# Altium PCB CM4mini.PcbDoc
Units mm, origin at the board's own origin, x right, y up, seen from the top; angles counter-clockwise.
Board outline 133.55 x 93.54 mm, 2 copper layers (Top Layer, Bottom Layer); 7 components, 0 nets, 332 pads, 0 vias.
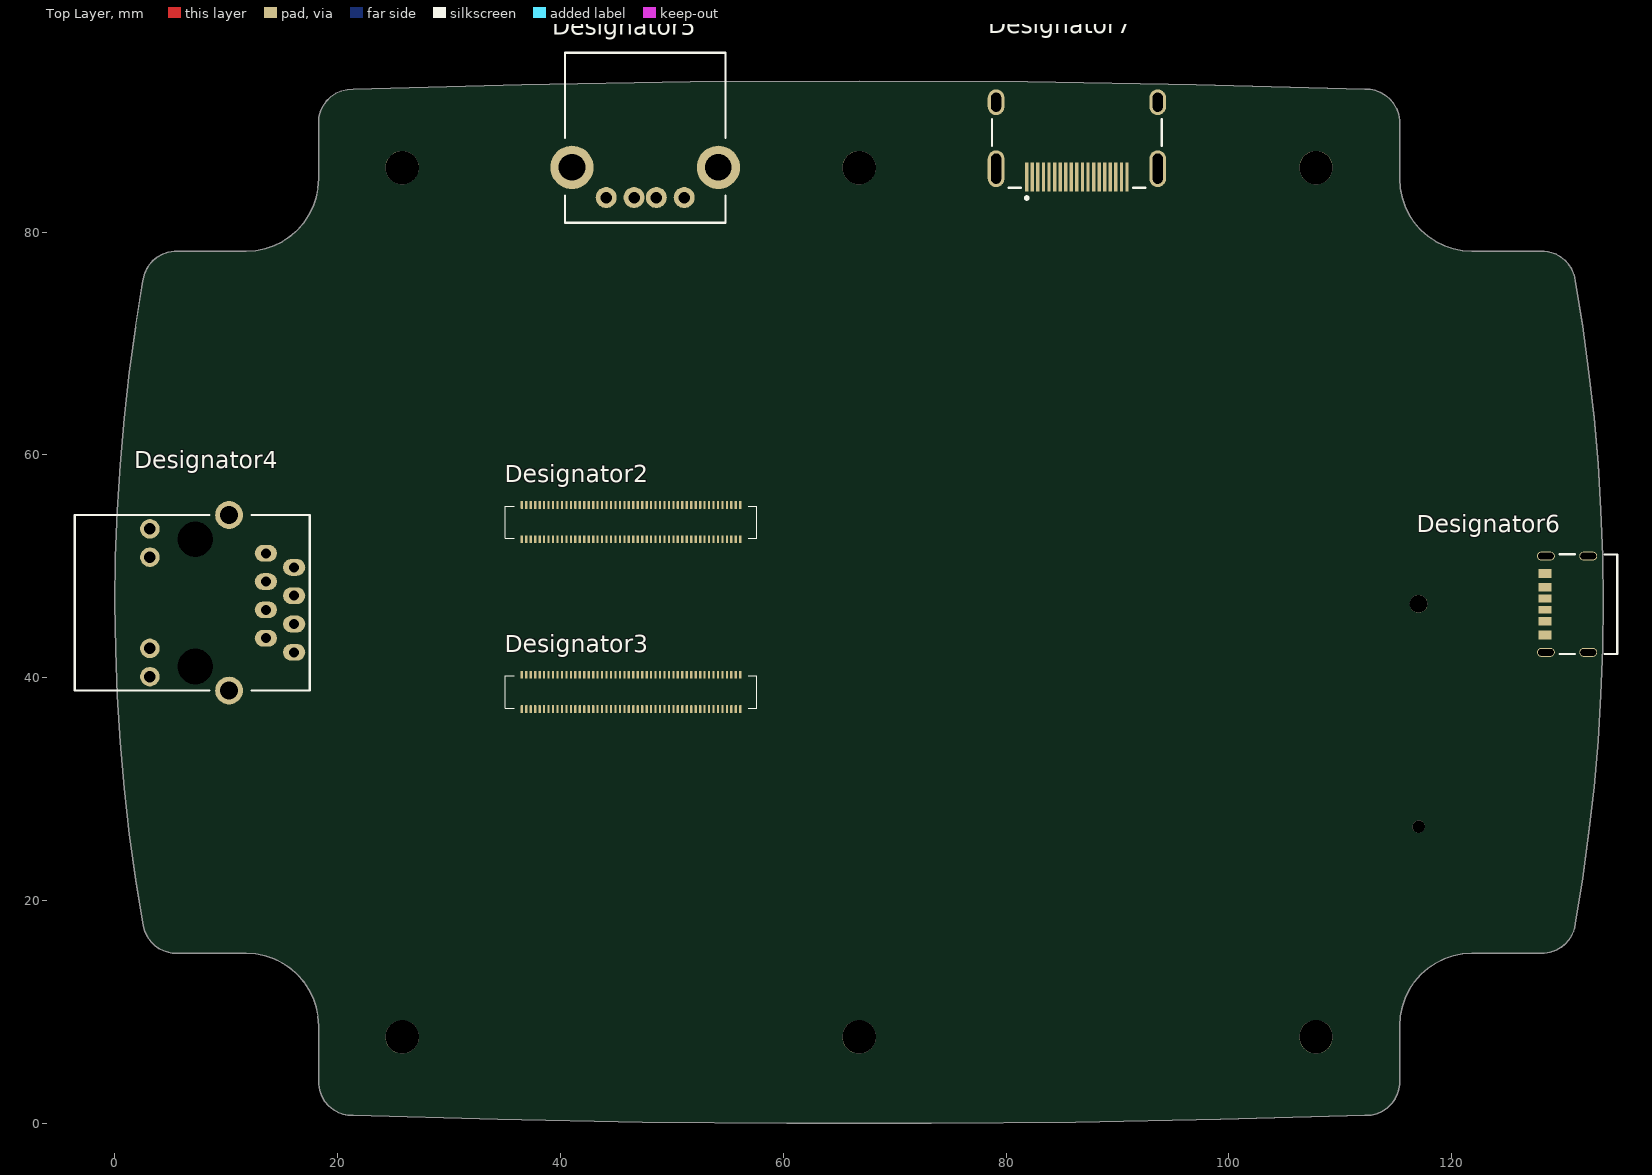
[diagram p0: Top Layer view]
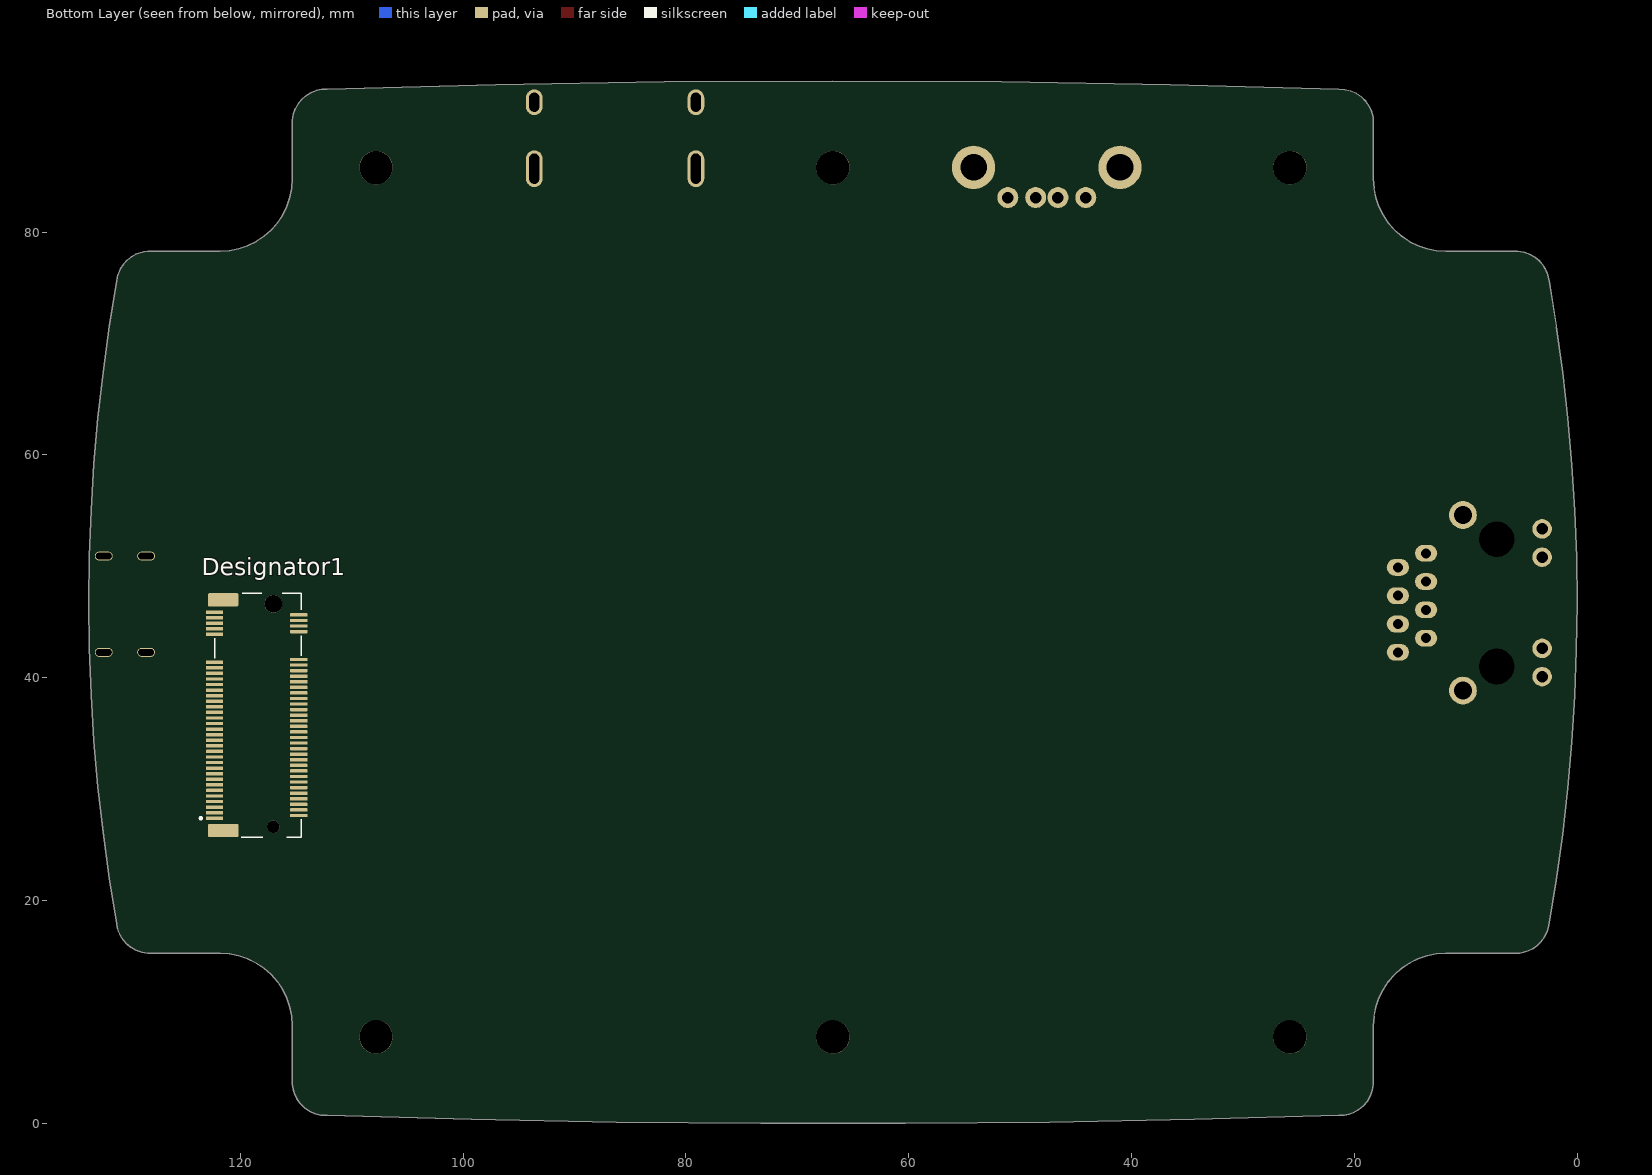
[diagram p1: Bottom Layer view, seen from below]

## Layer stack, top to bottom
Top Solder: solder mask 0.0102, Solder Resist, Dk 3.5
Top Layer: signal copper 0.0356
Dielectric 1: dielectric 0.32, FR-4, Dk 4.8
Bottom Layer: signal copper 0.0356
Bottom Solder: solder mask 0.0102, Solder Resist, Dk 3.5

## Board outline
18.318,84.781 18.263,83.933 18.097,83.099 17.824,82.294 17.448,81.531 16.975,80.824 16.415,80.185 15.775,79.625 15.068,79.152 14.306,78.776 13.501,78.503 12.667,78.337 11.818,78.281 5.35,78.281 4.809,78.197 4.29,78.016 3.814,77.743 3.432,77.425 3.137,77.089 2.896,76.711 2.713,76.302 2.614,75.967 2.555,75.624 1.888,71.524 1.322,67.409 0.86,63.28 0.501,59.142 0.244,54.996 0.091,50.844 0.042,46.69 0.096,42.537 0.253,38.386 0.514,34.24 0.878,30.102 1.345,25.974 1.915,21.859 2.587,17.759 2.731,17.231 2.969,16.736 3.294,16.294 3.653,15.95 4.02,15.695 4.422,15.498 4.85,15.362 5.194,15.302 5.542,15.281 11.818,15.281 12.667,15.226 13.501,15.06 14.306,14.787 15.068,14.411 15.775,13.938 16.415,13.378 16.975,12.738 17.448,12.031 17.824,11.269 18.097,10.464 18.263,9.63 18.318,8.781 18.318,3.532 18.407,2.992 18.591,2.475 18.867,2.002 19.227,1.583 19.656,1.238 20.092,0.999 20.515,0.849 20.957,0.762 21.19,0.743 21.423,0.743 34.39,0.381 47.36,0.14 60.332,0.02 73.305,0.02 86.276,0.14 99.247,0.381 112.214,0.743 112.76,0.773 113.294,0.901 113.794,1.125 114.248,1.438 114.637,1.828 114.921,2.236 115.116,2.641 115.249,3.071 115.293,3.3 115.318,3.532 115.318,8.781 115.374,9.63 115.54,10.464 115.813,11.269 116.189,12.031 116.662,12.738 117.222,13.378 117.861,13.938 118.568,14.411 119.331,14.787 120.136,15.06 120.97,15.226 121.818,15.281 128.287,15.281 128.828,15.366 129.347,15.547 129.823,15.819 130.205,16.137 130.5,16.474 130.741,16.851 130.924,17.261 131.023,17.596 131.082,17.939 131.747,22.026 132.311,26.128 132.773,30.244 133.132,34.369 133.389,38.502 133.543,42.641 133.595,46.781 133.543,50.922 133.389,55.06 133.132,59.194 132.773,63.319 132.311,67.434 131.747,71.537 131.082,75.624 130.971,76.161 130.763,76.669 130.467,77.131 130.13,77.496 129.779,77.774 129.39,77.996 128.972,78.158 128.632,78.239 128.287,78.281 121.818,78.281 120.97,78.337 120.136,78.503 119.331,78.776 118.568,79.152 117.861,79.625 117.222,80.185 116.662,80.824 116.189,81.531 115.813,82.294 115.54,83.099 115.374,83.933 115.318,84.781 115.318,90.031 115.23,90.571 115.045,91.088 114.77,91.561 114.41,91.98 113.98,92.324 113.544,92.563 113.122,92.714 112.68,92.801 112.447,92.819 112.214,92.82 97.085,93.23 81.953,93.476 66.818,93.558 51.684,93.476 36.552,93.23 21.423,92.82 20.877,92.79 20.343,92.661 19.843,92.438 19.389,92.125 19,91.734 18.716,91.326 18.521,90.922 18.388,90.492 18.344,90.262 18.318,90.031

## Design rules (kind name [scope] priority, off if disabled: settings)
Clearance [All] p1: gap=0.254 ignorepadtopadclearanceinfootprint=FALSE except(0: Arc-Hole Track-Hole SMDPad-Hole THPad-Hole Via-Hole Fill-Hole Poly-Hole Region-Hole Text-Hole)
PolygonConnect [All] p1: connectstyle=Relief reliefconductorwidth=0.254 reliefentries=4 polygonreliefangle="90 Angle" airgapwidth=0.254
RoutingVias [All] p1: holewidth=0.711 width=1.27 viastyle="Through Hole" minholewidth=0.711 minwidth=1.27 maxholewidth=0.711 maxwidth=1.27
SolderMaskExpansion [All] p1: expansion=0.102 istentingtop=FALSE
Width [All] p1: maxlimit=0.254 minlimit=0.254 preferedwidth=0.254
30 further rules are at their usual default settings.

## Components (designator, comment, footprint, x,y, rotation, side; value= is the part's Value field where it differs from the comment)
Designator1 "Comment" 1-2199119-3 118.526,36.651 r90 bottom
Designator2 "Comment" DF40C100DS04V51 46.355,53.975 r0 top
Designator3 "Comment" DF40C100DS04V51 46.355,38.735 r0 top
Designator4 "Comment" "ABRACON ARJC02-111008B" 6.985,46.736 r270 top
Designator5 "Comment" 67643-2911 47.625,84.455 r180 top
Designator6 "Comment" GCT_USB4125-GF-A 131.445,46.609 r90 top
Designator7 "Comment" 47151-1001 86.36,90.17 r180 top

## Footprints (in the part's own frame and the unit in brackets; to place one, negate y for a bottom-side part, rotate by r counter-clockwise, add the part's x,y. Pads: shape width x height; smd on the part's side, far side on the other; paste and mask are expansions set on the pad)
1-2199119-3 [mm]
  rrect25% 0.3x1.55 smd: 1(-9.25,3.775) 2(-9,-3.775) 3(-8.75,3.775) 4(-8.5,-3.775) 5(-8.25,3.775) 6(-8,-3.775) 7(-7.75,3.775) 8(-7.5,-3.775) 9(-7.25,3.775) 10(-7,-3.775) 11(-6.75,3.775) 12(-6.5,-3.775) 13(-6.25,3.775) 14(-6,-3.775) 15(-5.75,3.775) 16(-5.5,-3.775) 17(-5.25,3.775) 18(-5,-3.775) 19(-4.75,3.775) 20(-4.5,-3.775) 21(-4.25,3.775) 22(-4,-3.775) 23(-3.75,3.775) 24(-3.5,-3.775) 25(-3.25,3.775) 26(-3,-3.775) 27(-2.75,3.775) 28(-2.5,-3.775) 29(-2.25,3.775) 30(-2,-3.775) 31(-1.75,3.775) 32(-1.5,-3.775) 33(-1.25,3.775) 34(-1,-3.775) 35(-0.75,3.775) 36(-0.5,-3.775) 37(-0.25,3.775) 38(0,-3.775) 39(0.25,3.775) 40(0.5,-3.775) 41(0.75,3.775) 42(1,-3.775) 43(1.25,3.775) 44(1.5,-3.775) 45(1.75,3.775) 46(2,-3.775) 47(2.25,3.775) 48(2.5,-3.775) 49(2.75,3.775) 50(3,-3.775) 51(3.25,3.775) 52(3.5,-3.775) 53(3.75,3.775) 54(4,-3.775) 55(4.25,3.775) 56(4.5,-3.775) 57(4.75,3.775) 58(5,-3.775) 67(7.25,3.775) 68(7.5,-3.775) 69(7.75,3.775) 70(8,-3.775) 71(8.25,3.775) 72(8.5,-3.775) 73(8.75,3.775) 74(9,-3.775) 75(9.25,3.775)
  round 1.1 hole 1.1 unplated: MH1(-10,-1.5)
  round 1.6 hole 1.6 unplated: MH2(10,-1.5)
  rrect25% 1.2x2.75 smd: S1(-10.35,3) S2(10.35,3)
  silkscreen extent -10.95,-4 10.95,5.1, body extent -10.95,-4.32 10.95,4.38, height 3.11
47151-1001 [mm]
  rect 0.3x2.6 smd paste+0 mask+0: 1(4.5,5.235) 2(4,5.235) 3(3.5,5.235) 4(3,5.235) 5(2.5,5.235) 6(2,5.235) 7(1.5,5.235) 8(1,5.235) 9(0.5,5.235) 10(0,5.235) 11(-0.5,5.235) 12(-1,5.235) 13(-1.5,5.235) 14(-2,5.235) 15(-2.5,5.235) 16(-3,5.235) 17(-3.5,5.235) 18(-4,5.235) 19(-4.5,5.235)
  oval 1.5x3.3 hole 2.7 slot 0.9 at 0 deg paste-1000 mask+0: 20(-7.25,4.475) 21(7.25,4.475)
  oval 1.5x2.3 hole 1.7 slot 0.9 at 0 deg paste-1000 mask+0: 22(-7.25,-1.485) 23(7.25,-1.485)
  silkscreen extent -7.63,0.04 7.63,7.23, body extent -7.5,-6 7.5,6.15, height 6.23
67643-2911 [mm]
  round 1.88 hole 1.03: 1(-3.5,1.355) 2(-1,1.355) 3(1,1.355) 4(3.5,1.355)
  round 3.88 hole 2.38: 5(6.57,-1.355) 6(-6.57,-1.355)
  silkscreen extent -7.2,-11.63 7.2,3.63, body extent -7.99,-11.64 8,3.62, height 7.73
"ABRACON ARJC02-111008B" [mm]
  oval 1.5x2 hole 0.9: 1(-4.445,6.6) 2(-3.175,9.14) 3(-1.905,6.6) 4(-0.635,9.14) 5(0.635,6.6) 6(1.905,9.14) 7(3.175,6.6) 8(4.445,9.14)
  round 1.75 hole 1.02: 9(-6.63,-3.81) 10(-4.09,-3.81) 11(4.09,-3.81) 12(6.63,-3.81)
  round 0 hole 3.2 unplated: M(-5.715,0.25) M(5.715,0.25)
  round 2.5 hole 1.6: S(-7.875,3.3) S(7.875,3.3)
  silkscreen extent -7.87,-10.55 7.87,10.54, body extent -10.34,-10.55 10.34,10.55, height 16.07
DF40C100DS04V51 [mm]
  rrect25% 0.2x0.7 smd: 1(-9.8,-1.54) 2(-9.8,1.54) 3(-9.4,-1.54) 4(-9.4,1.54) 5(-9,-1.54) 6(-9,1.54) 7(-8.6,-1.54) 8(-8.6,1.54) 9(-8.2,-1.54) 10(-8.2,1.54) 11(-7.8,-1.54) 12(-7.8,1.54) 13(-7.4,-1.54) 14(-7.4,1.54) 15(-7,-1.54) 16(-7,1.54) 17(-6.6,-1.54) 18(-6.6,1.54) 19(-6.2,-1.54) 20(-6.2,1.54) 21(-5.8,-1.54) 22(-5.8,1.54) 23(-5.4,-1.54) 24(-5.4,1.54) 25(-5,-1.54) 26(-5,1.54) 27(-4.6,-1.54) 28(-4.6,1.54) 29(-4.2,-1.54) 30(-4.2,1.54) 31(-3.8,-1.54) 32(-3.8,1.54) 33(-3.4,-1.54) 34(-3.4,1.54) 35(-3,-1.54) 36(-3,1.54) 37(-2.6,-1.54) 38(-2.6,1.54) 39(-2.2,-1.54) 40(-2.2,1.54) 41(-1.8,-1.54) 42(-1.8,1.54) 43(-1.4,-1.54) 44(-1.4,1.54) 45(-1,-1.54) 46(-1,1.54) 47(-0.6,-1.54) 48(-0.6,1.54) 49(-0.2,-1.54) 50(-0.2,1.54) 51(0.2,-1.54) 52(0.2,1.54) 53(0.6,-1.54) 54(0.6,1.54) 55(1,-1.54) 56(1,1.54) 57(1.4,-1.54) 58(1.4,1.54) 59(1.8,-1.54) 60(1.8,1.54) 61(2.2,-1.54) 62(2.2,1.54) 63(2.6,-1.54) 64(2.6,1.54) 65(3,-1.54) 66(3,1.54) 67(3.4,-1.54) 68(3.4,1.54) 69(3.8,-1.54) 70(3.8,1.54) 71(4.2,-1.54) 72(4.2,1.54) 73(4.6,-1.54) 74(4.6,1.54) 75(5,-1.54) 76(5,1.54) 77(5.4,-1.54) 78(5.4,1.54) 79(5.8,-1.54) 80(5.8,1.54) 81(6.2,-1.54) 82(6.2,1.54) 83(6.6,-1.54) 84(6.6,1.54) 85(7,-1.54) 86(7,1.54) 87(7.4,-1.54) 88(7.4,1.54) 89(7.8,-1.54) 90(7.8,1.54) 91(8.2,-1.54) 92(8.2,1.54) 93(8.6,-1.54) 94(8.6,1.54) 95(9,-1.54) 96(9,1.54) 97(9.4,-1.54) 98(9.4,1.54) 99(9.8,-1.54) 100(9.8,1.54)
  silkscreen extent -11.3,-1.44 11.3,1.44, body extent -11.3,-1.69 11.3,1.69, height 1.4
GCT_USB4125-GF-A [mm]
  rect 0.7x1.2 smd: A5(-0.5,3.08) B5(0.5,3.08)
  rect 0.76x1.2 smd: A9(1.52,3.08) B9(-1.52,3.08)
  rect 0.8x1.2 smd: A12(2.75,3.08) B12(-2.75,3.08)
  oval 0.8x1.6 hole 0.6 slot 1.4 at 90 deg mask+0: S1(-4.32,3) S2(4.32,3) S3(-4.32,-0.8) S4(4.32,-0.8)
  silkscreen extent -4.47,-3.4 4.47,1.75, body extent -4.47,-3.4 4.47,3.5, height 3.26

## Free pads (board coordinates)
  round 3 hole 3: 1(25.818,7.781) 1(25.818,85.781) 1(66.818,7.781) 1(66.818,85.781) 1(107.818,7.781) 1(107.818,85.781)

## Nets (pads, with @x,y where several pads share a name; then routed paths per layer and width w, separated by ;. In a path a pad name is that pad's centre, name@x,y a point inside that pad or via, vN(x,y) a via of type N, cw(c..) or ccw(c..) an arc to the next point about the centre after c; other vN are vias at no path point)
pads on no net: Designator1.1 Designator1.2 Designator1.3 Designator1.4 Designator1.5 Designator1.6 Designator1.7 Designator1.8 Designator1.9 Designator1.10 Designator1.11 Designator1.12 Designator1.13 Designator1.14 Designator1.15 Designator1.16 Designator1.17 Designator1.18 Designator1.19 Designator1.20 Designator1.21 Designator1.22 Designator1.23 Designator1.24 Designator1.25 Designator1.26 Designator1.27 Designator1.28 Designator1.29 Designator1.30 Designator1.31 Designator1.32 Designator1.33 Designator1.34 Designator1.35 Designator1.36 Designator1.37 Designator1.38 Designator1.39 Designator1.40 Designator1.41 Designator1.42 Designator1.43 Designator1.44 Designator1.45 Designator1.46 Designator1.47 Designator1.48 Designator1.49 Designator1.50 Designator1.51 Designator1.52 Designator1.53 Designator1.54 Designator1.55 Designator1.56 Designator1.57 Designator1.58 Designator1.67 Designator1.68 Designator1.69 Designator1.70 Designator1.71 Designator1.72 Designator1.73 Designator1.74 Designator1.75 Designator1.MH1 Designator1.MH2 Designator1.S1 Designator1.S2 Designator2.1 Designator2.2 Designator2.3 Designator2.4 Designator2.5 Designator2.6 Designator2.7 Designator2.8 Designator2.9 Designator2.10 Designator2.11 Designator2.12 Designator2.13 Designator2.14 Designator2.15 Designator2.16 Designator2.17 Designator2.18 Designator2.19 Designator2.20 Designator2.21 Designator2.22 Designator2.23 Designator2.24 Designator2.25 Designator2.26 Designator2.27 Designator2.28 Designator2.29 Designator2.30 Designator2.31 Designator2.32 Designator2.33 Designator2.34 Designator2.35 Designator2.36 Designator2.37 Designator2.38 Designator2.39 Designator2.40 Designator2.41 Designator2.42 Designator2.43 Designator2.44 Designator2.45 Designator2.46 Designator2.47 Designator2.48 Designator2.49 Designator2.50 Designator2.51 Designator2.52 Designator2.53 Designator2.54 Designator2.55 Designator2.56 Designator2.57 Designator2.58 Designator2.59 Designator2.60 Designator2.61 Designator2.62 Designator2.63 Designator2.64 Designator2.65 Designator2.66 Designator2.67 Designator2.68 Designator2.69 Designator2.70 Designator2.71 Designator2.72 Designator2.73 Designator2.74 Designator2.75 Designator2.76 Designator2.77 Designator2.78 Designator2.79 Designator2.80 Designator2.81 Designator2.82 Designator2.83 Designator2.84 Designator2.85 Designator2.86 Designator2.87 Designator2.88 Designator2.89 Designator2.90 Designator2.91 Designator2.92 Designator2.93 Designator2.94 Designator2.95 Designator2.96 Designator2.97 Designator2.98 Designator2.99 Designator2.100 Designator3.1 Designator3.2 Designator3.3 Designator3.4 Designator3.5 Designator3.6 Designator3.7 Designator3.8 Designator3.9 Designator3.10 Designator3.11 Designator3.12 Designator3.13 Designator3.14 Designator3.15 Designator3.16 Designator3.17 Designator3.18 Designator3.19 Designator3.20 Designator3.21 Designator3.22 Designator3.23 Designator3.24 Designator3.25 Designator3.26 Designator3.27 Designator3.28 Designator3.29 Designator3.30 Designator3.31 Designator3.32 Designator3.33 Designator3.34 Designator3.35 Designator3.36 Designator3.37 Designator3.38 Designator3.39 Designator3.40 Designator3.41 Designator3.42 Designator3.43 Designator3.44 Designator3.45 Designator3.46 Designator3.47 Designator3.48 Designator3.49 Designator3.50 Designator3.51 Designator3.52 Designator3.53 Designator3.54 Designator3.55 Designator3.56 Designator3.57 Designator3.58 Designator3.59 Designator3.60 Designator3.61 Designator3.62 Designator3.63 Designator3.64 Designator3.65 Designator3.66 Designator3.67 Designator3.68 Designator3.69 Designator3.70 Designator3.71 Designator3.72 Designator3.73 Designator3.74 Designator3.75 Designator3.76 Designator3.77 Designator3.78 Designator3.79 Designator3.80 Designator3.81 Designator3.82 Designator3.83 Designator3.84 Designator3.85 Designator3.86 Designator3.87 Designator3.88 Designator3.89 Designator3.90 Designator3.91 Designator3.92 Designator3.93 Designator3.94 Designator3.95 Designator3.96 Designator3.97 Designator3.98 Designator3.99 Designator3.100 Designator4.1 Designator4.2 Designator4.3 Designator4.4 Designator4.5 Designator4.6 Designator4.7 Designator4.8 Designator4.9 Designator4.10 Designator4.11 Designator4.12 Designator4.M Designator4.S Designator5.1 Designator5.2 Designator5.3 Designator5.4 Designator5.5 Designator5.6 Designator6.A5 Designator6.A9 Designator6.A12 Designator6.B5 Designator6.B9 Designator6.B12 Designator6.S1 Designator6.S2 Designator6.S3 Designator6.S4 Designator7.1 Designator7.2 Designator7.3 Designator7.4 Designator7.5 Designator7.6 Designator7.7 Designator7.8 Designator7.9 Designator7.10 Designator7.11 Designator7.12 Designator7.13 Designator7.14 Designator7.15 Designator7.16 Designator7.17 Designator7.18 Designator7.19 Designator7.20 Designator7.21 Designator7.22 Designator7.23

## Silkscreen, mask and mechanical layers (free items; w line width, h text height)
Mechanical 1:
  drawing of 173 lines, arcs and shapes, not listed